# EAGLE board module_RevC (EAGLE 9.1.1)

Size 33.34 x 50.16 mm. Coordinates in mm from the lower left corner, seen from the top.
Outline: 33.33,0 33.33,50 0,50
Outline: 0,50.16 0,0 33.34,0
Copper layers (1*16): Top 0.035mm / dielectric 1.5mm / Bottom 0.035mm
Design rules "SeeedStudio_2layer_DRU_no_angle_20140221 *": minimum track width 6mil, minimum drill 12mil, track to track 6mil, track to pad 6mil, pad to pad 6mil, via to via 6mil, smd to smd 0mil, copper to edge 10mil, drill to drill 10mil, minimum pad ring 10mil, minimum via ring 6mil, stop-mask expansion 2mil, vias tented up to drill 100mil, thermal gap 10mil
Net classes: 0 default: width 0.254 mm, clearance 0.381 mm; 1 VCC: width 0.635 mm, clearance 0.381 mm; 2 GND: width 0.635 mm, clearance 0.381 mm

## Footprints (pad centres in the part's own frame; a part is rotated, then mirrored left to right if it is on the bottom)
0603 = smd 1.1 x 1: 1 -0.85,0; 2 0.85,0
10X-PADS = drill 1 pad 1.93 square: P$1 0,0; P$2 0,-2.54; P$3 0,-5.08; P$4 0,-7.62; P$5 0,-10.16; P$6 0,-12.7; P$7 0,-15.24; P$8 0,-17.78; P$9 0,-20.32; P$10 0,-22.86
LED3MM = drill 0.813 pad 1.676 octagon: NEG 1.27,0; POS -1.27,0
SOT127P798X216-8N = smd 1.5 x 0.6: GND -3.75,-1.905; PB0 3.75,-1.905; PB1 3.75,-0.635; PB2 3.75,0.635; PB3 -3.75,0.635; PB4 -3.75,-0.635; PB5 -3.75,1.905; VCC 3.75,1.905
HDRV6W64P254_2X3_762X508X868P = drill 1.1 pad 1.65: 0/MOSI/SDA 0,1.27; 2/SCK/SCL 0,3.81; 5/RST -2.54,3.81; GND -2.54,1.27; VCC 2.54,1.27 | drill 1.1 pad 1.65 square: 1/RST 2.54,3.81
AXIAL-0.3 = drill 0.9 pad 1.88: P$1 -3.81,0; P$2 3.81,0
1X01 = drill 1.016 pad 1.88: 1 0,0

## Placement (x,y rotation side)
C1  0.1uF  [0603]  3.17,40.64 0 top
GND  10X-PADS  [10X-PADS]  2.54,30.48 0 top
HELLO  LED3MM  [LED3MM]  29.21,36.2 270 top
IC1  ATTINY85-20SU  [SOT127P798X216-8N]  5.71,45.68 0 top
J1  M20-9980346  [HDRV6W64P254_2X3_762X508X868P]  16.51,43.18 0 top
POWER  LED3MM  [LED3MM]  3.81,36.2 270 top
R1  220  [AXIAL-0.3]  7.3,36.83 270 top
R2  220  [AXIAL-0.3]  25.72,36.83 270 top
U$1  ONE_PAD  [1X01]  7.62,15.24 0 top
U$2  ONE_PAD  [1X01]  5.08,22.86 0 top
U$3  ONE_PAD  [1X01]  5.08,20.32 0 top
U$4  ONE_PAD  [1X01]  5.08,17.78 0 top
U$5  ONE_PAD  [1X01]  5.08,15.24 0 top
U$6  ONE_PAD  [1X01]  5.08,12.7 0 top
U$7  ONE_PAD  [1X01]  5.08,10.16 0 top
U$8  ONE_PAD  [1X01]  5.08,7.62 0 top
U$9  ONE_PAD  [1X01]  7.62,22.86 0 top
U$10  ONE_PAD  [1X01]  7.62,12.7 90 top
U$11  ONE_PAD  [1X01]  7.62,20.32 0 top
U$12  ONE_PAD  [1X01]  7.62,10.16 0 top
U$13  ONE_PAD  [1X01]  7.62,17.78 0 top
U$14  ONE_PAD  [1X01]  7.62,7.62 0 top
U$15  ONE_PAD  [1X01]  10.16,22.86 0 top
U$16  ONE_PAD  [1X01]  12.7,22.86 0 top
U$17  ONE_PAD  [1X01]  10.16,10.16 0 top
U$18  ONE_PAD  [1X01]  10.16,20.32 0 top
U$19  ONE_PAD  [1X01]  12.7,20.32 0 top
U$20  ONE_PAD  [1X01]  10.16,7.62 0 top
U$21  ONE_PAD  [1X01]  10.16,17.78 0 top
U$22  ONE_PAD  [1X01]  12.7,17.78 0 top
U$23  ONE_PAD  [1X01]  12.7,10.16 0 top
U$24  ONE_PAD  [1X01]  10.16,15.24 0 top
U$25  ONE_PAD  [1X01]  12.7,15.24 0 top
U$26  ONE_PAD  [1X01]  12.7,7.62 0 top
U$27  ONE_PAD  [1X01]  10.16,12.7 0 top
U$28  ONE_PAD  [1X01]  12.7,12.7 0 top
U$29  ONE_PAD  [1X01]  15.24,22.86 0 top
U$30  ONE_PAD  [1X01]  17.78,22.86 0 top
U$31  ONE_PAD  [1X01]  20.32,22.86 0 top
U$32  ONE_PAD  [1X01]  22.86,22.86 0 top
U$33  ONE_PAD  [1X01]  15.24,20.32 0 top
U$34  ONE_PAD  [1X01]  17.78,20.32 0 top
U$35  ONE_PAD  [1X01]  20.32,20.32 0 top
U$36  ONE_PAD  [1X01]  22.86,20.32 0 top
U$37  ONE_PAD  [1X01]  15.24,17.78 0 top
U$38  ONE_PAD  [1X01]  17.78,17.78 0 top
U$39  ONE_PAD  [1X01]  20.32,17.78 0 top
U$40  ONE_PAD  [1X01]  22.86,17.78 0 top
U$41  ONE_PAD  [1X01]  15.24,15.24 0 top
U$42  ONE_PAD  [1X01]  17.78,15.24 0 top
U$43  ONE_PAD  [1X01]  20.32,15.24 0 top
U$44  ONE_PAD  [1X01]  22.86,15.24 0 top
U$45  ONE_PAD  [1X01]  15.24,12.7 0 top
U$46  ONE_PAD  [1X01]  17.78,12.7 0 top
U$47  ONE_PAD  [1X01]  20.32,12.7 0 top
U$48  ONE_PAD  [1X01]  22.86,12.7 0 top
U$49  ONE_PAD  [1X01]  15.24,10.16 0 top
U$50  ONE_PAD  [1X01]  17.78,10.16 0 top
U$51  ONE_PAD  [1X01]  20.32,10.16 0 top
U$52  ONE_PAD  [1X01]  22.86,10.16 0 top
U$53  ONE_PAD  [1X01]  15.24,7.62 0 top
U$54  ONE_PAD  [1X01]  17.78,7.62 0 top
U$55  ONE_PAD  [1X01]  20.32,7.62 0 top
U$56  ONE_PAD  [1X01]  22.86,7.62 0 top
U$57  ONE_PAD  [1X01]  25.4,22.86 0 top
U$58  ONE_PAD  [1X01]  27.94,22.86 0 top
U$59  ONE_PAD  [1X01]  25.4,10.16 0 top
U$60  ONE_PAD  [1X01]  25.4,20.32 0 top
U$61  ONE_PAD  [1X01]  27.94,20.32 0 top
U$62  ONE_PAD  [1X01]  25.4,7.62 0 top
U$63  ONE_PAD  [1X01]  25.4,17.78 0 top
U$64  ONE_PAD  [1X01]  27.94,17.78 0 top
U$65  ONE_PAD  [1X01]  27.94,10.16 0 top
U$66  ONE_PAD  [1X01]  25.4,15.24 0 top
U$67  ONE_PAD  [1X01]  27.94,15.24 0 top
U$68  ONE_PAD  [1X01]  27.94,7.62 0 top
U$69  ONE_PAD  [1X01]  25.4,12.7 0 top
U$70  ONE_PAD  [1X01]  27.94,12.7 0 top
U$71  GND  [1X01]  12.7,1.91 180 top
U$72  SDA  [1X01]  17.78,1.91 0 top
U$73  SCL  [1X01]  15.24,1.91 0 top
U$74  VCC  [1X01]  20.32,1.91 90 top
U$75  ONE_PAD  [1X01]  22.86,38.1 0 top
U$76  ONE_PAD  [1X01]  22.86,35.56 0 top
U$77  ONE_PAD  [1X01]  22.86,33.02 0 top
U$78  ONE_PAD  [1X01]  20.32,38.1 0 top
U$79  ONE_PAD  [1X01]  20.32,35.56 0 top
U$80  ONE_PAD  [1X01]  20.32,33.02 0 top
U$81  ONE_PAD  [1X01]  17.78,38.1 0 top
U$82  ONE_PAD  [1X01]  17.78,33.02 0 top
U$83  ONE_PAD  [1X01]  17.78,35.56 0 top
U$84  ONE_PAD  [1X01]  15.24,38.1 0 top
U$85  ONE_PAD  [1X01]  15.24,33.02 0 top
U$86  ONE_PAD  [1X01]  15.24,35.56 0 top
U$87  ONE_PAD  [1X01]  12.7,35.56 0 top
U$88  ONE_PAD  [1X01]  12.7,38.1 0 top
U$89  ONE_PAD  [1X01]  12.7,33.02 0 top
U$90  ONE_PAD  [1X01]  10.16,35.56 0 top
U$91  ONE_PAD  [1X01]  10.16,38.1 0 top
U$92  ONE_PAD  [1X01]  10.16,33.02 0 top
U$93  ONE_PAD  [1X01]  5.08,25.4 90 top
U$94  ONE_PAD  [1X01]  5.08,27.94 90 top
U$95  ONE_PAD  [1X01]  5.08,30.48 90 top
U$96  ONE_PAD  [1X01]  22.86,30.48 90 top
U$97  ONE_PAD  [1X01]  7.62,25.4 90 top
U$98  ONE_PAD  [1X01]  7.62,27.94 90 top
U$99  ONE_PAD  [1X01]  7.62,30.48 90 top
U$100  ONE_PAD  [1X01]  25.4,30.48 90 top
U$101  ONE_PAD  [1X01]  10.16,25.4 90 top
U$102  ONE_PAD  [1X01]  10.16,27.94 90 top
U$103  ONE_PAD  [1X01]  10.16,30.48 90 top
U$104  ONE_PAD  [1X01]  27.94,30.48 90 top
U$105  ONE_PAD  [1X01]  12.7,25.4 90 top
U$106  ONE_PAD  [1X01]  12.7,27.94 90 top
U$107  ONE_PAD  [1X01]  12.7,30.48 90 top
U$108  ONE_PAD  [1X01]  25.4,27.94 90 top
U$109  ONE_PAD  [1X01]  15.24,25.4 90 top
U$110  ONE_PAD  [1X01]  15.24,27.94 90 top
U$111  ONE_PAD  [1X01]  15.24,30.48 90 top
U$112  ONE_PAD  [1X01]  27.94,27.94 90 top
U$113  ONE_PAD  [1X01]  17.78,25.4 90 top
U$114  ONE_PAD  [1X01]  17.78,27.94 90 top
U$115  ONE_PAD  [1X01]  17.78,30.48 90 top
U$116  ONE_PAD  [1X01]  25.4,25.4 90 top
U$117  ONE_PAD  [1X01]  20.32,25.4 90 top
U$118  ONE_PAD  [1X01]  20.32,27.94 90 top
U$119  ONE_PAD  [1X01]  20.32,30.48 90 top
U$120  ONE_PAD  [1X01]  27.94,25.4 90 top
U$121  ONE_PAD  [1X01]  22.86,25.4 90 top
U$122  ONE_PAD  [1X01]  22.86,27.94 90 top
VCC  10X-PADS  [10X-PADS]  30.48,30.48 0 top

## Library data of the parts
C1 = SparkFun-Capacitors; PROD_ID: CAP-08604
GND HELLO POWER U$1-U$122 VCC = BadgeParts
IC1 = BadgeParts; ARROW_PART_NUMBER: ATTINY85-20SU; ARROW_PRICE/STOCK: https://www.arrow.com/en/products/attiny85-20su/microchip-technology; DESCRIPTION: MICROCHIP - ATTINY85-20SU - MICROCONTROLLER MCU, 8 BIT, ATTINY, 20MHZ, SOIC-8; HEIGHT: 2.16mm; MANUFACTURER_NAME: Microchip; MANUFACTURER_PART_NUMBER: ATTINY85-20SU; RS_PART_NUMBER: 1331674; RS_PRICE/STOCK: http://uk.rs-online.com/web/p/products/1331674
J1 = BadgeParts; ARROW_PART_NUMBER: M20-9980346; ARROW_PRICE/STOCK: http://uk.rs-online.com/web/p/products/7457046P; DESCRIPTION: 03+03 DIL Vertical Pin Header HARWIN M20 Series, 2.54mm Pitch 6 Way 2 Row Straight PCB Header, Solder Termination, 3A; HEIGHT: 8.68mm; MANUFACTURER_NAME: HARWIN; MANUFACTURER_PART_NUMBER: M20-9980346; RS_PART_NUMBER: 7457046P; RS_PRICE/STOCK: http://uk.rs-online.com/web/p/products/7457046P
R1 R2 = SparkFun-Resistors

## Nets
GND [GND]: C1.1 GND.P$1 GND.P$2 GND.P$3 GND.P$4 GND.P$5 GND.P$6 GND.P$7 GND.P$8 GND.P$9 GND.P$10 HELLO.NEG IC1.GND J1.GND POWER.NEG U$71.1
N$1: POWER.POS R1.P$1
N$3: HELLO.POS R2.P$1
PB0: IC1.PB0 J1.0/MOSI/SDA R2.P$2 U$72.1 U$75.1 U$76.1 U$77.1
PB1: IC1.PB1 J1.1/RST U$78.1 U$79.1 U$80.1
PB2: IC1.PB2 J1.2/SCK/SCL U$73.1 U$81.1 U$82.1 U$83.1
PB3: IC1.PB3 U$84.1 U$85.1 U$86.1
PB4: IC1.PB4 U$87.1 U$88.1 U$89.1
PB5: IC1.PB5 J1.5/RST U$90.1 U$91.1 U$92.1
VCC [VCC]: C1.2 IC1.VCC J1.VCC R1.P$2 U$74.1 VCC.P$1 VCC.P$2 VCC.P$3 VCC.P$4 VCC.P$5 VCC.P$6 VCC.P$7 VCC.P$8 VCC.P$9 VCC.P$10

## Tracks (layer width: path | path; a pad name or v marks a point on that pad's centre or on a via)
GND  (15 unrouted)
N$1  (1 unrouted)
N$3  (1 unrouted)
PB0  (6 unrouted)
PB1  (4 unrouted)
PB2  (5 unrouted)
PB3  (3 unrouted)
PB4  (3 unrouted)
PB5  (4 unrouted)
VCC  (14 unrouted)

## Text on the board
Dimension: ^ V-Groove
tPlace: I2C PROTO / 2018 REV C | 5 | 4 | 3 | 2 | 1 | 0 | POWER | HELLO | GND | SCL | SDA | VCC
bPlace: HOKANSON/BONTRAGER / BIT.LY/BADGECULTURE